# Altium PCB UltiSID.PcbDoc
Units mm, origin at the board's own origin, x right, y up, seen from the top; angles counter-clockwise.
Board outline 21 x 38.88 mm, 4 copper layers (Top Layer, Layer 1, Layer 2, Bottom Layer), stack 0.603 mm thick; 34 components, 45 nets, 209 pads, 58 vias.
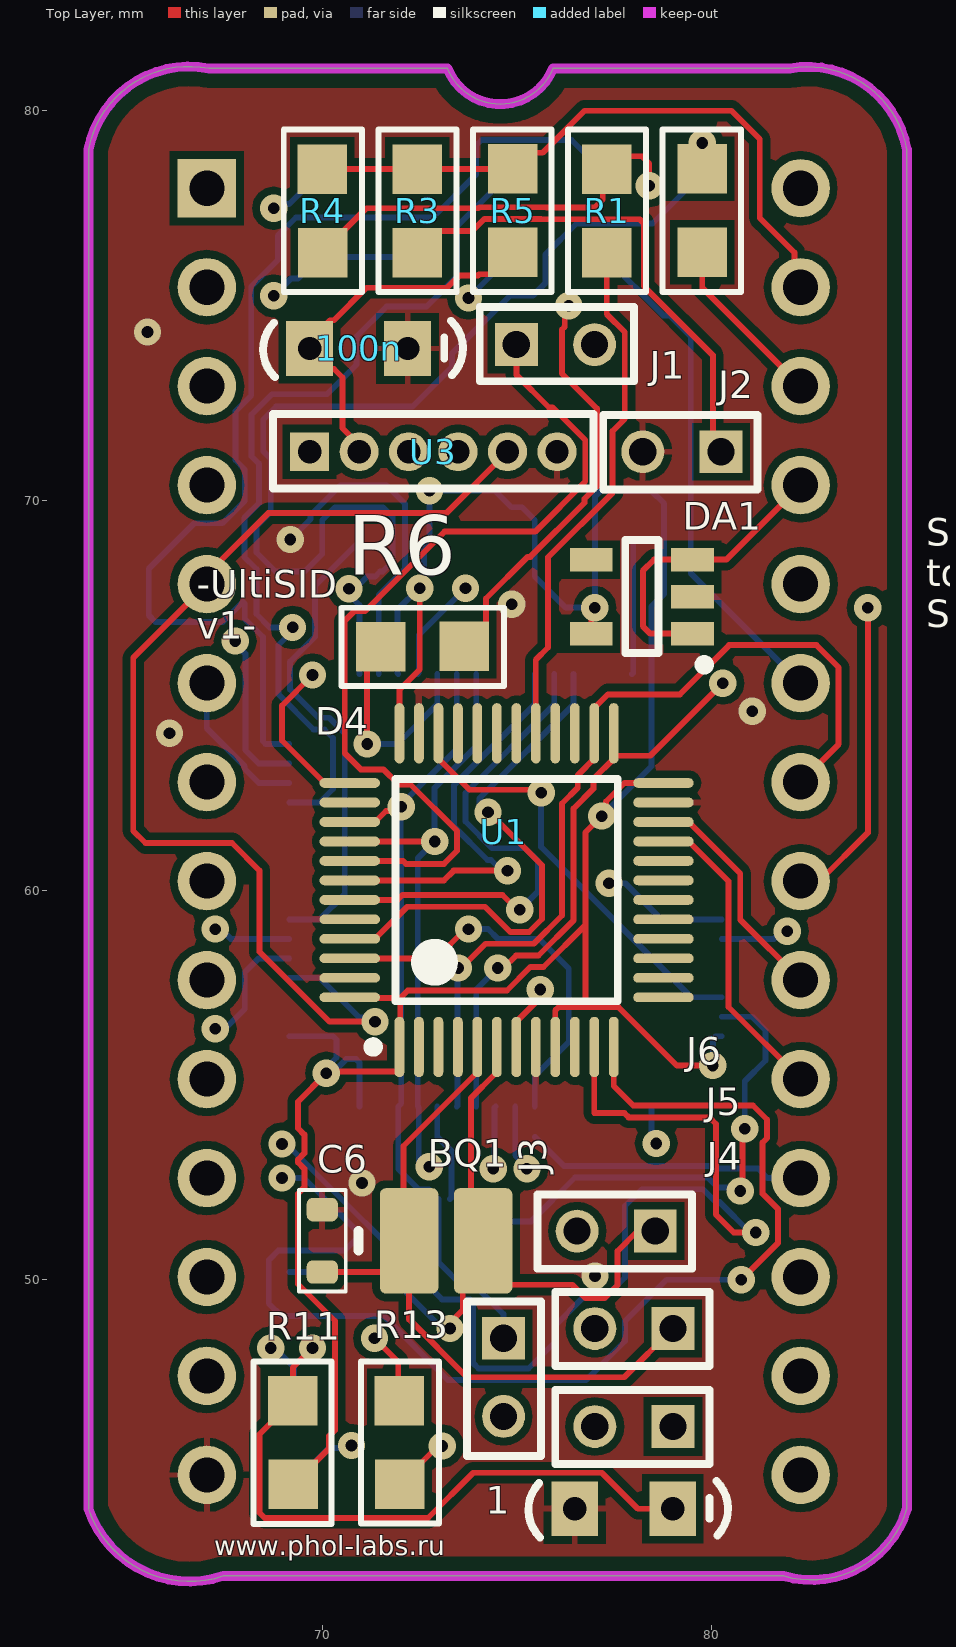
[diagram p0: Top Layer view]
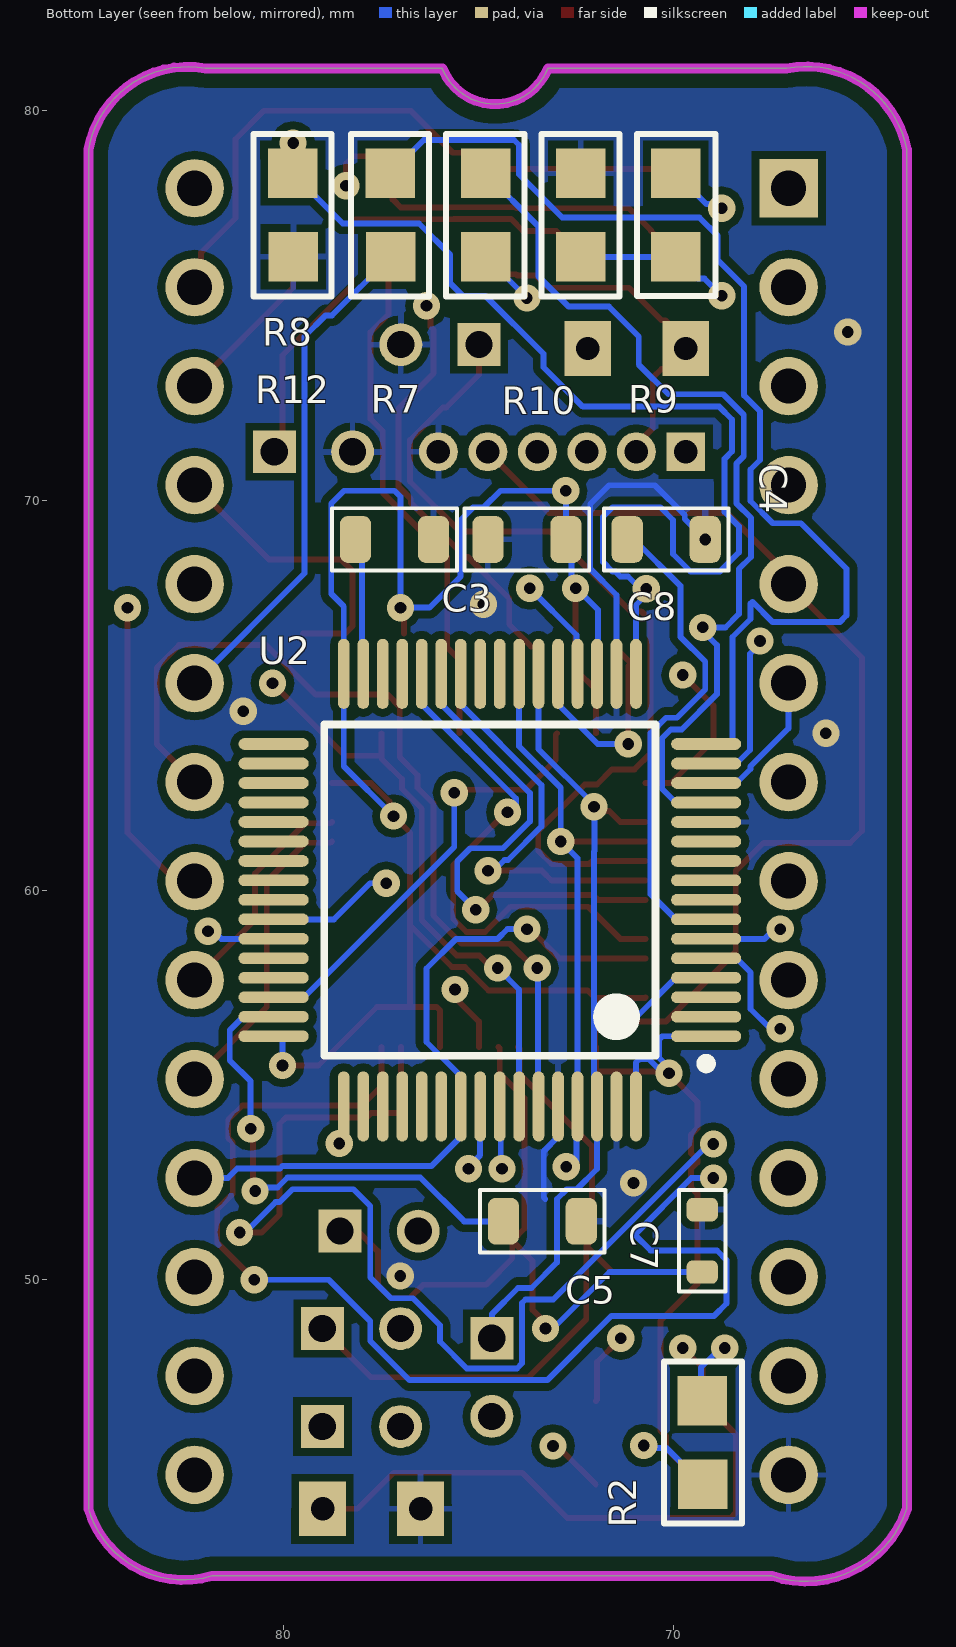
[diagram p1: Bottom Layer view, seen from below]
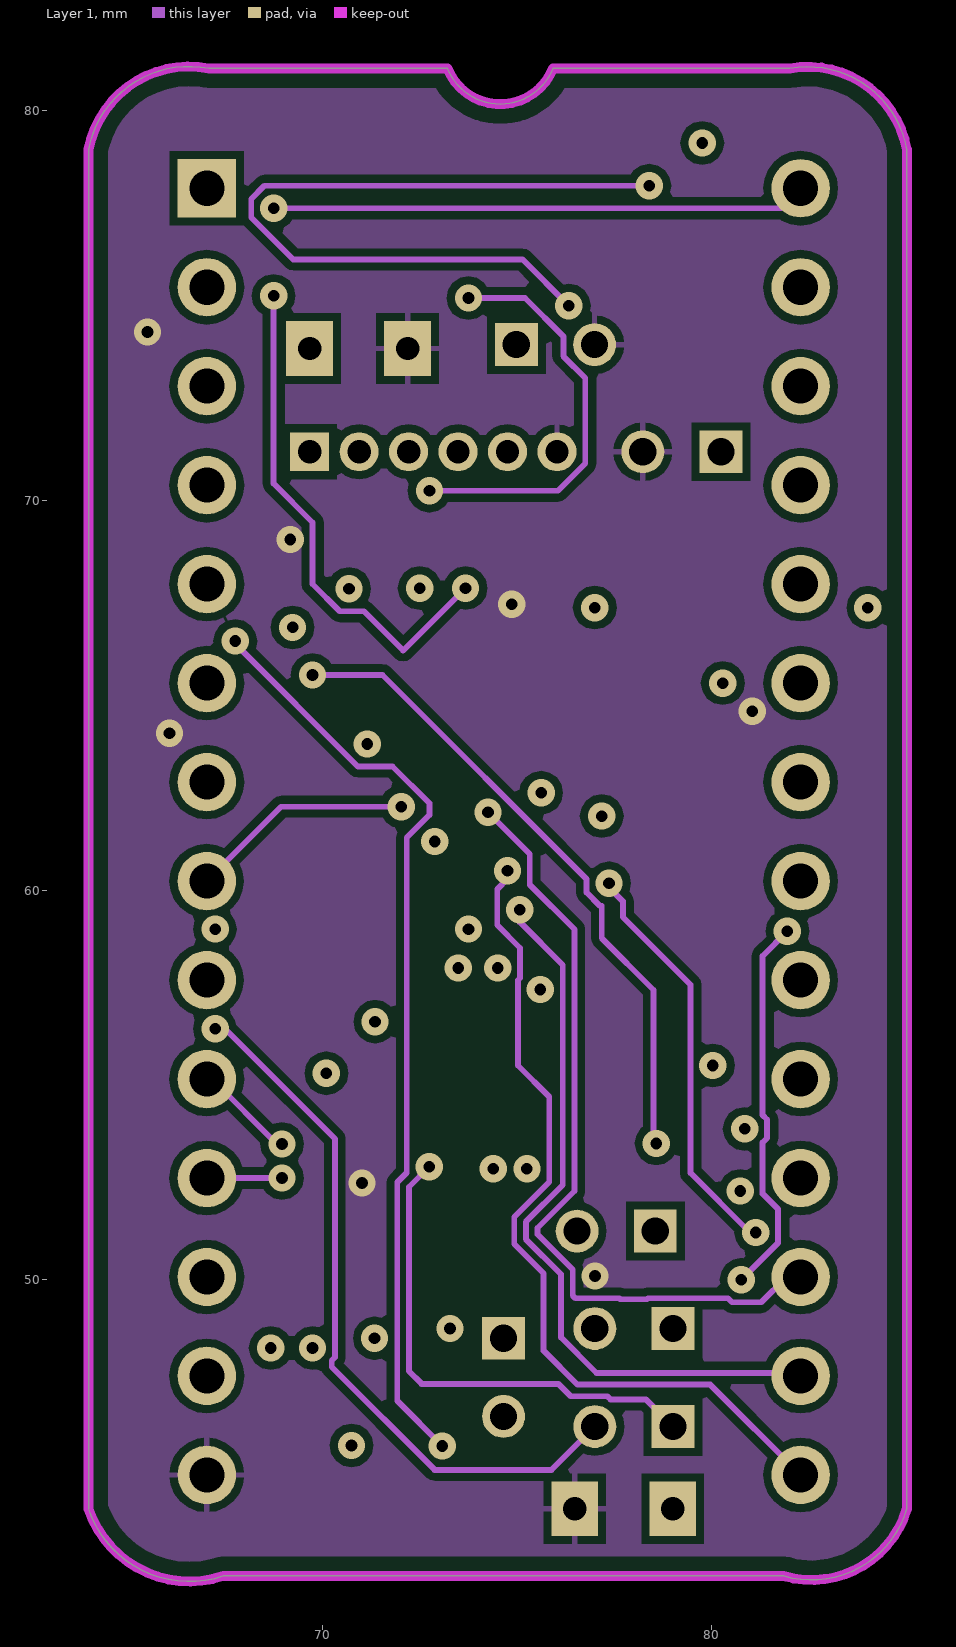
[diagram p2: Layer 1]
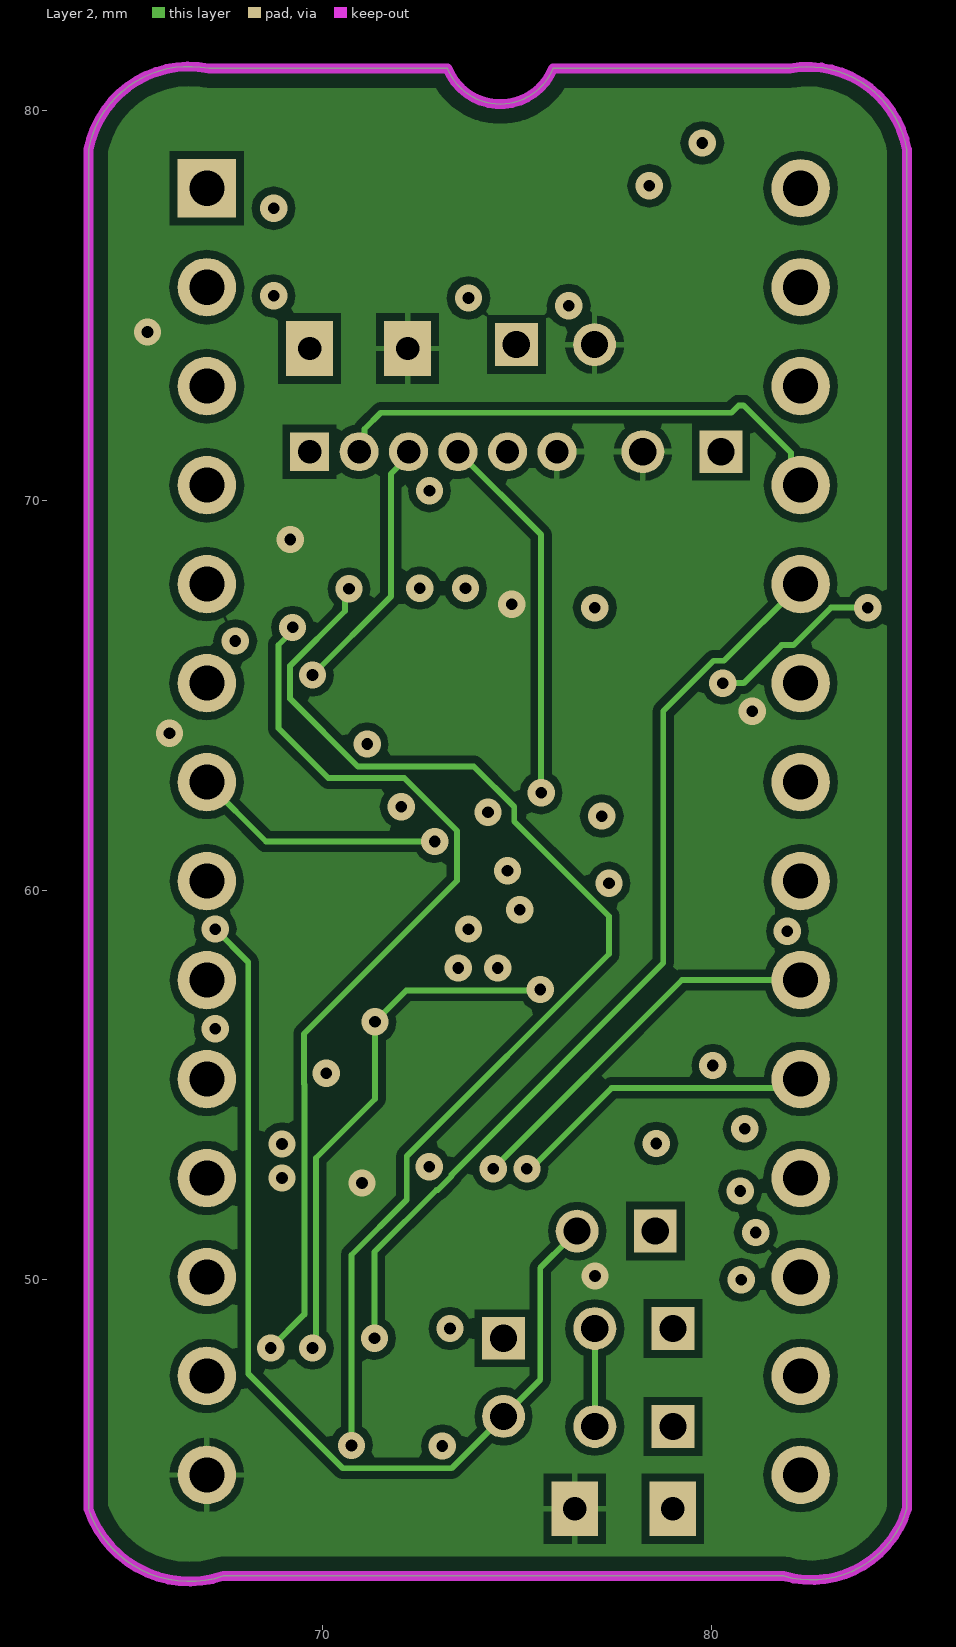
[diagram p3: Layer 2]

## Layer stack, top to bottom
Top Solder: solder mask 0.0102, Solder Resist, Dk 3.5
Top Layer: signal copper 0.0356
Dielectric 2: prepreg 0.0711, PP-006, Dk 4.1
Layer 1: signal copper 0.035
Dielectric 1: dielectric 0.32, FR-4, Dk 4.8
Layer 2: signal copper 0.035
Dielectric 3: prepreg 0.0711, PP-006, Dk 4.1
Bottom Layer: signal copper 0.0356
Bottom Solder: solder mask 0.0102, Solder Resist, Dk 3.5

## Board outline
64,44.123 ccw(c66.594,44.995) 67.464,42.4 81.836,42.4 ccw(c82.556,44.844) 85,44.123 85,79.011 ccw(c82.462,78.549) 82,81.087 75.919,81.087 cw(c74.566,81.626) 73.213,81.087 73,81.087 67.087,81.087 ccw(c66.582,78.506) 64,79.011

## Design rules (kind name [scope] priority, off if disabled: settings)
BackDrilling [All] p1: maxstublength=0.381 usetopbackdrill=TRUE usebottombackdrill=TRUE holeoversize=0.025 holetolplus=0 holetolminus=0
BoardOutlineClearance [All] p1: gap=0.5 ignorepadtopadclearanceinfootprint=FALSE except(0: Arc-SplitBarrior Arc-SplitContinuation Track-SplitBarrior Track-SplitContinuation SMDPad-SplitContinuation THPad-SplitContinuation Via-SplitBarrior Via-SplitContinuation Fill-SplitBarrior Fill-SplitContinuation Poly-SplitBarrior Poly-SplitContinuation Region-SplitBarrior Region-SplitContinuation Text-SplitBarrior Text-SplitContinuation)
Clearance [All] p1: gap=0.15 ignorepadtopadclearanceinfootprint=FALSE except(0.2: Arc-Fill Arc-Poly Arc-Region Track-Fill Track-Poly Track-Region SMDPad-Fill SMDPad-Poly SMDPad-Region THPad-Fill THPad-Poly THPad-Region Via-Fill Via-Poly Via-Region Fill-Fill Fill-Poly Fill-Region Poly-Poly Poly-Region Region-Region)
ComponentClearance [All] p1: gap=-0.05 collisioncheckmode=3 verticalgap=0 showdistances=TRUE
DiffPairsRouting [All] p1: maxlimit=0.15 minlimit=0.15 mostfreqgap=0.15 toplayer_minwidth=0.15 toplayer_maxwidth=0.15 toplayer_prefwidth=0.15 midlayer1_minwidth=0.15 midlayer1_maxwidth=0.15 midlayer1_prefwidth=0.15 midlayer2_minwidth=0.15 midlayer2_maxwidth=0.15 midlayer2_prefwidth=0.15 bottomlayer_minwidth=0.15 bottomlayer_maxwidth=0.15 bottomlayer_prefwidth=0.15 maxuncoupledlength=5
FabricationTestPointUsage TestPointUsage [All] p1: valid=0 allowmultiple=FALSE
FabricationTestpoint Testpoint [All] p1: side=3 testpointundercomponent=TRUE minsize=1.016 maxsize=2.54 preferedsize=1.524 minholesize=0.508 maxholesize=1.016 preferedholesize=0.813 testpointgrid=0.025 allowsidetop=TRUE allowsidebottom=TRUE usegrid=TRUE gridtolerance=0
Height [All] p1: minheight=0 maxheight=50 prefheight=10
HoleSize [All] p1: absolutevalues=TRUE maxlimit=5 minlimit=0.3 maxpercent=80.000 minpercent=20.000
HoleToHoleClearance [All] p1: gap=0.4 allowstackedmicrovias=TRUE
MinimumAnnularRing [All] p1: minimumring=0.2
MinimumSolderMaskSliver [All] p1: minsoldermaskwidth=0.15
PlaneClearance [All] p1: clearance=0.254
PolygonConnect [All] p1: thpad.connectstyle=Relief thpad.reliefconductorwidth=0.15 thpad.reliefentries=4 thpad.polygonreliefangle="90 Angle" thpad.airgapwidth=0.2 smdpad.connectstyle=Relief smdpad.reliefconductorwidth=0.15 smdpad.reliefentries=4 smdpad.polygonreliefangle="90 Angle" smdpad.airgapwidth=0.2 via.connectstyle=Direct via.reliefconductorwidth=0.15 via.reliefentries=4 via.polygonreliefangle="90 Angle" via.airgapwidth=0.2
RoutingVias [All] p1: holewidth=0.3 width=0.7 viastyle="Through Hole" minholewidth=0.3 minwidth=0.7 maxholewidth=2 maxwidth=3
SilkToSilkClearance [All] p1: silktosilkclearance=0.15
SilkToSolderMaskClearance SilkscreenOverComponentPads [IsPad] p1: minsilkscreentomaskgap=0.1 clearancetoexposedcopper=TRUE
SolderMaskExpansion [All] p1: expansion=0.075
ViasUnderSMD [All] p1: allowed=TRUE
Width [All] p1: maxlimit=5 minlimit=0.15 preferedwidth=0.15
19 further rules are at their usual default settings.

## Components (designator, comment, footprint, x,y, rotation, side; value= is the part's Value field where it differs from the comment)
1 "C" "THROUGH HOLE - CAP POL (mini)" 76.479,44.125 r0 top
100n "C" "THROUGH HOLE - CAP POL (mini)" 69.673,73.9 r0 top
BQ1 "XTAL" XTAL3225 73.177,51 r0 top value="8 MHz"
C3 "CAP" C-0805 77.147,69 r180 bottom value=10.0
C4 "CAP" C-0805 70.175,69 r0 bottom value=10.0
C5 "CAP" C-0805 73.354,51.5 r180 bottom value=10.0
C6 "CAP" C-0603 70,51 r90 top value=12
C7 "CAP" C-0603 69.25,51 r90 bottom value=12
C8 "CAP" C-0805 73.75,69 r0 bottom value=10.0
D4 "Microcontroller" TQFP48_L 74.729,60 r90 top value=STM32F103C6
DA1 "=Device" SOT95P280X145-5N 78.2,67.532 r180 top
J1 "Jumper" "2-PIN HEADER SMALL 2mm" 74.979,74 r0 top
J2 "Jumper" "2-PIN HEADER SMALL 2mm" 80.232,71.25 r180 top
J3 "Jumper" "2-PIN HEADER SMALL 2mm" 74.65,48.5 r270 top
J4 "Jumper" "2-PIN HEADER SMALL 2mm" 79,46.235 r180 top
J5 "Jumper" "2-PIN HEADER SMALL 2mm" 79,48.75 r180 top
J6 "Jumper" "2-PIN HEADER SMALL 2mm" 78.545,51.25 r180 top
R1 "1K" "SMD-0805 - R" 77.293,78.5 r270 top
R2 "4K7" "SMD-0805 - R" 69.244,46.892 r270 bottom
R3 "1K" "SMD-0805 - R" 72.431,78.5 r270 top
R4 "2K2" "SMD-0805 - R" 70,78.5 r270 top
R5 "4K7" "SMD-0805 - R" 74.888,76.366 r90 top
R6 "1K" "SMD-0805 - R" 73.642,66.256 r180 top
R7 "4K7" "SMD-0805 - R" 74.806,76.25 r90 bottom
R8 "4K7" "SMD-0805 - R" 79.75,76.25 r90 bottom
R9 "4K7" "SMD-0805 - R" 69.93,78.392 r270 bottom
R10 "4K7" "SMD-0805 - R" 72.362,76.25 r90 bottom
R11 "4K7" "SMD-0805 - R" 69.25,44.75 r90 top
R12 "1K" "SMD-0805 - R" 77.25,76.25 r90 bottom
R13 "1K" "SMD-0805 - R" 71.979,46.892 r270 top
U1 "nano Swin SID PCB" DIP-28-AY-38192-SID 67.005,77.927 r270 top locked
U2 "STM32F405RGT6" STM-LQFP64_N 74.7,60 r0 bottom
U3 "6PinConector" "6-PIN HEADER small 1.27mm" 69.673,71.25 r0 top
? "4K7" "SMD-0805 - R" 79.75,76.366 r90 top

## Footprints (in the part's own frame and the unit in brackets; to place one, negate y for a bottom-side part, rotate by r counter-clockwise, add the part's x,y. Pads: shape width x height; smd on the part's side, far side on the other; paste and mask are expansions set on the pad)
"2-PIN HEADER SMALL 2mm" [mm]
  rect 1.1x1.1 hole 0.7: 1(0,0)
  round 1.1 hole 0.7: 2(2.007,0)
  silkscreen extent -0.94,-0.94 3.02,0.97
"6-PIN HEADER small 1.27mm" [mm]
  rect 1x1 hole 0.6: 1(0,0)
  round 1 hole 0.6: 2(1.27,0) 3(2.54,0) 4(3.81,0) 5(5.08,0) 6(6.35,0)
  silkscreen extent -0.94,-0.94 7.29,0.97
C-0603 [mm] "Chip Capacitor, Body 1.6x0.8mm"
  rrect50% 0.6x0.8 smd: 1(-0.8,0) 2(0.8,0)
  silkscreen extent -1.3,-0.6 1.3,0.6, body extent -0.8,-0.4 0.8,0.4, height 0.82
C-0805 [mm] "Chip Capacitor, Body 2.0x1.25mm"
  rrect50% 0.8x1.2 smd: 1(-1,0) 2(1,0)
  silkscreen extent -1.6,-0.8 1.6,0.8, body extent -1,-0.62 1,0.63, height 0.62
DIP-28-AY-38192-SID [mm] "CerDIP, Window; 28 Leads; Row Spacing 15.24 mm; Pitch 2.54 mm"
  rect 1.5x1.5 hole 0.9: 1(-0.085,0.03)
  round 1.5 hole 0.9: 2(2.455,0.03) 3(4.995,0.03) 4(7.535,0.03) 5(10.075,0.03) 6(12.615,0.03) 7(15.155,0.03) 8(17.695,0.03) 9(20.235,0.03) 10(22.775,0.03) 11(25.315,0.03) 12(27.855,0.03) 13(30.395,0.03) 14(32.935,0.03) 15(32.935,15.27) 16(30.395,15.27) 17(27.855,15.27) 18(25.315,15.27) 19(22.775,15.27) 20(20.235,15.27) 21(17.695,15.27) 22(15.155,15.27) 23(12.615,15.27) 24(10.075,15.27) 25(7.535,15.27) 26(4.995,15.27) 27(2.455,15.27) 28(-0.085,15.27)
"SMD-0805 - R" [mm]
  rect 1.27x1.27 smd: 1(0,0) 2(2.142,0.006)
  silkscreen extent -1.02,-0.99 3.15,1.02
SOT95P280X145-5N [mm] "SOT, 0.95mm pitch; 5 pin, 1.60mm W X 2.90mm L X 1.45mm H body, IPC Medium Density"
  rect 1.1x0.6 smd: 1(-1.3,0.95) 2(-1.3,0) 3(-1.3,-0.95) 4(1.3,-0.95) 5(1.3,0.95)
  silkscreen extent -1.73,-1.45 0.43,1.87, body extent -1.4,-1.5 1.4,1.5, height 1.45
STM-LQFP64_N [mm] "Thin QFP, 64-Leads, Body 10x10mm, Pitch 0.5mm, IPC Medium Density"
  oval 1.8x0.3 smd: 1(-5.55,3.75) 2(-5.55,3.25) 3(-5.55,2.75) 4(-5.55,2.25) 5(-5.55,1.75) 6(-5.55,1.25) 7(-5.55,0.75) 8(-5.55,0.25) 9(-5.55,-0.25) 10(-5.55,-0.75) 11(-5.55,-1.25) 12(-5.55,-1.75) 13(-5.55,-2.25) 14(-5.55,-2.75) 15(-5.55,-3.25) 16(-5.55,-3.75) 33(5.55,-3.75) 34(5.55,-3.25) 35(5.55,-2.75) 36(5.55,-2.25) 37(5.55,-1.75) 38(5.55,-1.25) 39(5.55,-0.75) 40(5.55,-0.25) 41(5.55,0.25) 42(5.55,0.75) 43(5.55,1.25) 44(5.55,1.75) 45(5.55,2.25) 46(5.55,2.75) 47(5.55,3.25) 48(5.55,3.75)
  oval 0.3x1.8 smd: 17(-3.75,-5.55) 18(-3.25,-5.55) 19(-2.75,-5.55) 20(-2.25,-5.55) 21(-1.75,-5.55) 22(-1.25,-5.55) 23(-0.75,-5.55) 24(-0.25,-5.55) 25(0.25,-5.55) 26(0.75,-5.55) 27(1.25,-5.55) 28(1.75,-5.55) 29(2.25,-5.55) 30(2.75,-5.55) 31(3.25,-5.55) 32(3.75,-5.55) 49(3.75,5.55) 50(3.25,5.55) 51(2.75,5.55) 52(2.25,5.55) 53(1.75,5.55) 54(1.25,5.55) 55(0.75,5.55) 56(0.25,5.55) 57(-0.25,5.55) 58(-0.75,5.55) 59(-1.25,5.55) 60(-1.75,5.55) 61(-2.25,5.55) 62(-2.75,5.55) 63(-3.25,5.55) 64(-3.75,5.55)
  silkscreen extent -5.67,-4.25 4.25,4.57, body extent -5,-5 5,5, height 1.6
"THROUGH HOLE - CAP POL (mini)" [mm]
  rect 1.2x1.4 hole 0.6: 1(0,0) 2(2.515,0)
  silkscreen extent -1.19,-0.74 3.93,0.71
TQFP48_L [mm] "48-Pin Thin Quad Flat Pack 0.5 mm Pitch, IPC High Density"
  oval 1.55x0.25 smd: 1(-4.025,2.75) 2(-4.025,2.25) 3(-4.025,1.75) 4(-4.025,1.25) 5(-4.025,0.75) 6(-4.025,0.25) 7(-4.025,-0.25) 8(-4.025,-0.75) 9(-4.025,-1.25) 10(-4.025,-1.75) 11(-4.025,-2.25) 12(-4.025,-2.75) 25(4.025,-2.75) 26(4.025,-2.25) 27(4.025,-1.75) 28(4.025,-1.25) 29(4.025,-0.75) 30(4.025,-0.25) 31(4.025,0.25) 32(4.025,0.75) 33(4.025,1.25) 34(4.025,1.75) 35(4.025,2.25) 36(4.025,2.75)
  oval 0.25x1.55 smd: 13(-2.75,-4.025) 14(-2.25,-4.025) 15(-1.75,-4.025) 16(-1.25,-4.025) 17(-0.75,-4.025) 18(-0.25,-4.025) 19(0.25,-4.025) 20(0.75,-4.025) 21(1.25,-4.025) 22(1.75,-4.025) 23(2.25,-4.025) 24(2.75,-4.025) 37(2.75,4.025) 38(2.25,4.025) 39(1.75,4.025) 40(1.25,4.025) 41(0.75,4.025) 42(0.25,4.025) 43(-0.25,4.025) 44(-0.75,4.025) 45(-1.25,4.025) 46(-1.75,4.025) 47(-2.25,4.025) 48(-2.75,4.025)
  silkscreen extent -4.15,-2.85 2.85,3.55, body extent -3.5,-3.5 3.5,3.5, height 1.6
XTAL3225 [mm] "XTAL, Body 3.2x2.5mm"
  rrect20% 1.5x2.7 smd: 1(-0.95,0) 2(0.95,0)
  silkscreen extent -2.25,-0.25 -2.25,0.25, body extent -1.6,-1.25 1.6,1.25, height 1

## Part data
BQ1: "Crystal Oscillator", Manufacturer=NDK, Package=3225, Part Number=NX3225GD-8MHZ-STD-CRA-3, Tolerance="50 ppm", Parameters="8 MHz 8pF 50 ppm"
C3 C4 C5 C8: "Capacitor", Alt Part Num=CC0805KKX7R6BB106, Manufacturer=Yageo, Package=0805, Part Number="0805-10uF 10V +/-10% X7R", Tolerance=10%, Parameters="X7R, 10V", Unit Price=0.0359
C6 C7: "Capacitor", Alt Part Num=CL10C120JB8NNNC, Manufacturer=Samsung, Package=0603, Part Number="0603-12pF 50V +/-5% NP0", Tolerance=5%, Parameters="NP0, 50V", Unit Price=0.0018
D4: library part STM32F103Cx, "MC Cortex-M3", Manufacturer=ST, Package=LQFP-48, Part Number=STM32F103C6T6A, Parameters=16-32K
DA1: library part LP2985, "150mA Low-Noise Low-Dropout Regulator Whit Shutdown"
R1 R2 R3 R4 R5 R6 R7 R8 R9 R10 R11 R12 R13 ?: library part R
U1: library part MOS6581_SID
U2: "ARM Cortex-M4 32-bit MCU+FPU, 210 DMIPS, 1024 kB Flash, 192 kB Internal RAM, 51 I/Os, 64-pin LQFP, -40 to 85 degC, Tray", I/Os (High Current)=51, Manufacturer=STMicroelectronics, Operating Frequency(F) (Processor speed) (MHz)=168, Supplier Part Number 1=497-11767-ND, Supply Voltage(Vcc) max (V)=3.6, Supply Voltage(Vcc) min (V)=1.8, ComponentLink1Description="Manufacturer URL", ComponentLink1URL=http://www.st.com/web/en/home.html, ComponentLink2Description=Datasheet, ComponentLink2URL=http://www.st.com/st-web-ui/static/active/en/resource/technical/document/datasheet/DM00037051.pdf, ComponentLink3Description="Package Specification", ComponentLink3URL=http://www.st.com/st-web-ui/static/active/en/resource/technical/document/datasheet/DM00037051.pdf, Core="ARM Cortex-M4", D/A Converter=2x12-bit, DatasheetVersion="Rev. 4", FLASH Size (Prog) (kB)=1024, Internal RAM Size (kB)=192, Mounting Technology="Surface Mount", PackageDescription="64-Pin Low Profile Quad Flat Package, 10 x 10 mm Body, 0.5 mm Pitch", PackageReference=LQFP64, PackageVersion="Rev. 4, 06/2013", Packing=Tray, PartNumber=STM32F405RGT6, Supplier 1=Digi-Key, Supplier 2=Farnell, Supplier 3=Newark, Supplier 4=Mouser, Supplier Part Number 2=2064363, Supplier Part Number 3=73T2329, Supplier Part Number 4=511-STM32F405RGT6

## Via types
v1: diameter 0.7, hole 0.3, Top Layer to Bottom Layer, tented both sides, 43 vias
v2: diameter 0.7, hole 0.3, Top Layer to Bottom Layer, 15 vias

## Nets (pads, with @x,y where several pads share a name; then routed paths per layer and width w, separated by ;. In a path a pad name is that pad's centre, name@x,y a point inside that pad or via, vN(x,y) a via of type N, cw(c..) or ccw(c..) an arc to the next point about the centre after c; other vN are vias at no path point)
3V3: C8.1 D4.1 D4.9 D4.24 D4.36 D4.48 DA1.5 R7.1 R11.1 U2.1 U2.19 U2.32 U2.48 U2.64 | length 82.4
  Top Layer w0.15: R11.1 70.175,45.675 70.175,45.988 70.325,46.138 70.325,48.945 69.375,49.895 69.375,52.21 69.539,52.374 69.539,52.85 69.375,53.014 69.375,53.085 69.539,53.249 69.539,53.725 69.375,53.889 69.375,54.571 v1(70.104,55.3) 70.154,55.35 71.933,55.35 71.979,55.396 D4.1 71.998,55.994 71.998,57.229 72,57.231 ; D4.48 70.723,57.231 72,57.231 ; D4.36 71.979,65.141 72.5,65.662 v2(72.5,67.75) ; D4.9 75.979,56.914 76.067,57.002 76.729,57.002 ; DA1.5 76.9,67.157 v2(76.993,67.25) ; D4.24 77.754,62.75 77.277,62.273 77.277,62.005 v1(77.172,61.9) 76.75,61.478 76.75,59.101 ; v1(80.022,55.5) 79.099,55.5 77.597,57.002 76.729,57.002 ; 72,57.231 72.194,57.425 74.738,57.425 75.338,58.025 75.674,58.025 76.75,59.101 ; 76.729,57.002 76.75,57.023 76.75,59.101
  Layer 1 w0.15: v1(72.75,70.25) 76.048,70.25 76.748,70.95 76.748,73.141 76.185,73.704 76.185,74.212 75.203,75.194 v1(73.75,75.194)
  Bottom Layer w0.15: U2.1 70.275,56.25 70.363,56.162 70.363,55.708 70.104,55.449 v1(70.104,55.3) 70.253,55.3 70.616,55.663 70.862,55.663 70.95,55.575 U2.64 ; U2.19 71.925,65.575 71.925,67.196 v2@72.479,67.75 ; v2(72.5,67.75) v2@72.479,67.75 ; v1(73.75,75.194) R7.1 ; v1(77.172,61.9) 78.45,63.178 U2.32 78.45,67.282 78.772,67.605 78.772,69.921 78.444,70.25 77.147,70.25 76.993,70.096 v2(76.993,67.25) 76.25,67.25 75.45,68.05 75.45,69.501 75.126,69.825 74.855,69.825 74.43,70.25 v1(72.75,70.25) C8.1 72.605,68.855 72.605,67.876 v2@72.479,67.75 ; v1(80.022,55.5) 80.022,56.181 80.092,56.25 U2.48
6581SEL: D4.41 J1.1 | length 22.5
  Top Layer w0.15: D4.41 72.073,60.75 72.148,60.675 73.12,60.675 73.457,61.012 73.457,61.521 72.265,62.713 71.953,62.713 71.566,63.1 70.987,63.1 70.575,63.512 70.575,66.913 70.818,67.156 71.093,67.156 73.137,69.2 75.462,69.2 76.748,70.486 76.748,71.55 75.911,72.388 75.816,72.388 74.979,73.225 J1.1
!CS: D4.39 J3.1 U1.8 U2.22 U2.62 | length 26.4
  Top Layer w0.15: D4.39 71.354,61.75 71.637,62.033 71.922,62.033 v1(72.027,62.138)
  Layer 1 w0.15: U1.8 68.941,62.138 v1(72.027,62.138)
  Bottom Layer w0.15: U2.22 73.45,63.618 72.027,62.195 v1(72.027,62.138) 72.011,62.122 72.011,61.012 72.027,60.995 72.027,54.527 U2.62 71.95,52.844 72.469,52.325 72.73,52.325 72.979,52.076 72.979,50.447 73.634,49.792 73.978,49.792 74.65,49.12 J3.1
!RES: 1.2 D4.7 R11.2 U1.5 U2.4 U3.5 | length 60.2
  Top Layer w0.15: v1(69.75,48.25) 69.742,48.25 69.244,47.752 R11.2 68.39,46.038 68.39,44.022 68.522,43.89 72.713,43.89 73.872,45.05 77.172,45.05 78.097,44.125 1.2 ; v1(71.354,56.625) 70.184,56.625 68.389,58.42 68.389,60.5 67.682,61.207 65.46,61.207 65.148,61.519 65.148,65.965 U1.5 67.119,67.852 67.119,68.182 68.612,69.675 73.178,69.675 U3.5 ; D4.7 74.979,56.625 75.49,57.136 75.49,57.345 v1(75.595,57.45)
  Layer 2 w0.15: v1(69.75,48.25) 69.839,48.339 69.839,53.124 71.354,54.639 v1(71.354,56.625) 72.154,57.425 75.57,57.425 v1(75.595,57.45)
  Bottom Layer w0.15: U2.4 69.93,57.75 70.95,56.73 71.249,56.73 v1(71.354,56.625)
/2: U1.6 U2.14 | length 3.9
  Bottom Layer w0.15: U1.6 67.035,64.151 68.01,63.176 68.01,63.109 68.37,62.75 U2.14
A0: U1.9
A1: D4.11 U1.10 U2.42 | length 44.1
  Top Layer w0.15: D4.11 76.979,54.276 77.753,54.276 77.86,54.169 79.929,54.169 80.1,53.998 80.1,51.673 80.557,51.215 v1(81.123,51.215)
  Layer 1 w0.15: U1.10 67.167,55.152 68.832,53.487 v1(68.964,53.487) ; v2(77.358,60.175) 77.358,60.07 77.712,59.716 77.712,59.308 79.447,57.573 79.447,52.744 80.976,51.215 v1(81.123,51.215)
  Bottom Layer w0.15: v1(68.964,53.487) 69.081,53.487 73.076,49.492 73.787,49.492 73.875,49.404 73.875,48.963 73.875,47.857 74.007,47.725 75.293,47.725 75.983,48.415 75.983,48.835 76.672,49.525 77.238,49.525 77.77,50.056 77.77,51.893 78.202,52.325 79.767,52.325 80.1,51.992 80.199,51.992 80.976,51.215 v1(81.123,51.215) ; v2(77.358,60.175) 77.775,60.175 78.7,59.25 U2.42
A2: D4.12 U1.11 U2.43 | length 44.2
  Top Layer w0.15: D4.12 77.479,54.975 77.979,54.475 81.051,54.475 81.414,54.111 81.414,53.635 81.3,53.521 81.3,52.518 81.3,52.208 81.698,51.811 81.698,50.948 v1(80.75,50)
  Layer 1 w0.15: U1.11 v1(68.964,52.612) ; v1(80.75,50) 81.698,50.948 81.698,51.811 81.3,52.208 81.3,53.521 81.414,53.635 81.414,54.111 81.3,54.225 81.3,58.308 v1(81.934,58.942)
  Bottom Layer w0.15: v1(68.964,52.612) 69.531,52.612 70.984,51.159 70.575,50.75 68.87,50.75 68.625,50.505 68.625,49.395 68.945,49.075 71.576,49.075 73.226,47.425 76.764,47.425 77.768,48.429 77.768,48.937 78.832,50 v1(80.75,50) ; U2.43 81.593,58.75 81.785,58.942 v1(81.934,58.942)
A3: U1.12
A4: U1.13
A5: D4.14
AUD1: D4.29 R1.2 | length 13.5
  Top Layer w0.15: D4.29 75.479,65.91 75.794,66.225 75.794,68.544 77.45,70.2 77.45,71.78 77.695,72.025 77.76,72.091 77.76,74.321 77.299,74.782 R1.2
AUOUT: R6.2 U2.21 | length 5.7
  Top Layer w0.15: v2(71.15,63.75) 71.15,65.752 71.076,65.826 R6.2
  Bottom Layer w0.15: v2(71.15,63.75) 71.93,63.75 72.95,64.77 U2.21
AX: R13.2 U2.15 | length 29.4
  Top Layer w0.15: R13.2 v1@72.828,45.593
  Layer 1 w0.15: v1(67.766,66.391) 67.766,66.32 70.912,63.175 71.803,63.175 72.75,62.228 72.75,61.931 72.169,61.35 72.169,52.749 71.923,52.504 71.923,46.895 v1(73.081,45.737)
  Bottom Layer w0.15: v1(67.766,66.391) 67.766,66.325 68.025,66.066 68.025,63.595 68.37,63.25 U2.15
AY: R12.2 U2.16 | length 29.1
  Bottom Layer w0.15: 67.963,67.401 67.439,66.877 65.721,66.877 65.547,67.052 65.547,68.249 66.715,69.417 67.439,69.417 68.01,69.988 68.01,70.796 67.77,71.037 67.77,72.288 68.175,72.693 68.175,75.488 68.855,76.168 68.855,76.792 69.325,77.262 72.843,77.262 73.952,78.371 73.952,79.12 74.084,79.252 76.396,79.252 R12.2 ; 68.01,67.355 68.01,66.961 68.475,66.496 68.475,63.819 68.544,63.75 U2.16
D0: D4.42 U1.15 U2.26 | length 32.4
  Top Layer w0.15: D4.42 73.119,60.25 73.369,60.5 v1(74.75,60.5)
  Layer 1 w0.15: v1(74.75,60.5) 74.75,60.287 74.488,60.025 74.488,59.103 75.075,58.516 75.075,57.743 75.02,57.688 75.02,55.502 75.825,54.698 75.825,52.512 74.924,51.611 74.924,50.92 75.679,50.165 75.679,48.181 76.55,47.31 79.957,47.31 U1.15
  Bottom Layer w0.15: v1(74.75,60.5) 74.601,60.5 74.326,60.775 74.237,60.775 73.375,61.637 73.375,62.695 75.45,64.77 U2.26
D1: D4.43 U1.16 U2.27 | length 31.8
  Top Layer w0.15: D4.43 71.93,59.75 72.054,59.875 74.625,59.875 75,59.5 v1(75.063,59.5)
  Layer 1 w0.15: v1(75.063,59.5) 75.063,59.187 76.17,58.08 76.17,52.433 75.224,51.487 75.224,51.044 76.125,50.143 76.125,48.522 77.037,47.61 82.197,47.61 U1.16
  Bottom Layer w0.15: v1(75.063,59.5) 75.538,59.975 75.538,60.738 75.201,61.075 74.362,61.075 73.675,61.762 73.675,62.495 75.95,64.77 U2.27
D2: D4.45 U1.17 U2.28 | length 34
  Top Layer w0.15: D4.45 71.354,58.75 72.179,59.575 74.175,59.575 74.825,58.925 75.301,58.925 75.638,59.262 75.638,60.638 74.276,62 v1(74.25,62)
  Layer 1 w0.15: v1(74.25,62) 75.325,60.925 75.325,60.138 76.47,58.993 76.47,52.278 75.524,51.332 75.524,51.168 76.425,50.267 76.425,49.593 76.493,49.525 77.622,49.525 77.647,49.5 78.332,49.5 78.357,49.525 80.412,49.525 80.512,49.425 81.263,49.425 81.91,50.072 U1.17
  Bottom Layer w0.15: v1@74.03,62.063 74.03,62.35 76.45,64.77 U2.28 ; v1@74.25,61.843 v1(74.25,62)
D3: D4.46 U1.18 U2.55 | length 17.5
  Top Layer w0.15: D4.46 72.923,58.25 73.673,59 v1(73.75,59)
  Bottom Layer w0.15: v1(73.75,59) 74.25,59 74.5,58.75 75.563,58.75 76.325,57.988 76.325,56.105 75.45,55.23 U2.55 ; U2.55@75.45,53.67 76.195,52.925 80.016,52.925 80.086,52.855 81.182,52.855 81.425,52.612 U1.18
D4: D4.21 U1.19 U2.56 | length 17.8
  Top Layer w0.15: D4.21 78.787,61.217 79.437,61.217 80.425,60.228 80.425,57.002 U1.19
  Layer 2 w0.15: v1@75.25,52.75 77.425,54.925 82.048,54.925 U1.19
  Bottom Layer w0.15: U2.56 74.95,53.199 75.25,52.899 v1@75.25,52.75
  other v1: 75.25,52.85
D5: D4.22 U1.20 U2.57 | length 17.4
  Top Layer w0.15: D4.22 78.787,61.717 79.437,61.717 80.727,60.427 80.727,59.241 U1.20
  Layer 2 w0.15: v1(74.387,52.85) 79.229,57.692 U1.20
  Bottom Layer w0.15: v1(74.387,52.85) 74.421,52.884 74.421,54.421 U2.57
D6: D4.25 U1.21 U2.58 | length 27.9
  Top Layer w0.15: v1(74.5,58) 74.649,58 74.974,58.325 75.55,58.325 76.45,59.225 76.45,62.098 76.955,62.602 76.955,62.851 77.479,63.375 D4.25@77.479,63.496 ; D4.25 D4.25@77.479,63.496 ; v2(80.278,65.312) 78.416,63.45 77.525,63.45 D4.25@77.479,63.496 ; U1.21@81.926,60.232 U1.21 82.76,60.232 84,61.472 v2(84,67.25)
  Layer 2 w0.15: v2(80.278,65.312) 80.812,65.312 81.787,66.287 82.089,66.287 83.052,67.25 v2(84,67.25)
  Bottom Layer w0.15: U2.58 73.95,57.45 v1(74.5,58)
D7: D4.26 U1.22 U2.59 | length 23
  Top Layer w0.15: v1(73.487,58) 73.563,58 74.188,58.625 75.426,58.625 76.15,59.349 76.15,62.222 76.555,62.627 76.555,62.951 77.012,63.408 77.012,64.708 77.329,65.025 79.178,65.025 80.44,66.287 82.679,66.287 83.25,65.716 83.25,63.747 U1.22
  Bottom Layer w0.15: U2.59 73.468,54.468 73.468,57.982 v1(73.487,58)
EXTIN: ?.1 U1.26 | length 4.5
  Top Layer w0.15: ?.1 79.75,75.457 U1.26
GND: 1.1 100n.2 C3.2 C4.1 C5.2 C6.2 C7.2 C8.2 D4.8 D4.23 D4.35 D4.44 D4.47 DA1.2 J1.2 J2.2 R8.1 R10.2 U1.14 U2.12 U2.18 U2.60 U2.63 U3.6 | length 11
  Bottom Layer w0.15: v2(69.175,69) 69.7,69.525 69.7,69.625 70.467,70.392 71.644,70.392 72.125,69.911 72.125,68.249 71.45,67.574 U2.18 ; U2.60 72.95,53.67 73.319,53.301 73.319,52.116 73.279,52.076
  other v2: 77,50.1 71.016,52.482 66.077,64.025 81.03,64.59 74.864,67.335 65.514,74.321
Net_2: ?.2 R2.2 R8.2 U2.17 | length 60.4
  Layer 2 w0.15: v1(70.687,67.731) 70.581,67.626 70.581,67.165 69.175,65.758 69.175,64.912 70.912,63.175 73.888,63.175 74.925,62.138 74.925,61.762 77.358,59.329 77.358,58.364 72.169,53.174 72.169,52.053 70.75,50.634 v1(70.75,45.75)
  Bottom Layer w0.15: R2.2 70.175,45.687 70.687,45.687 v1(70.75,45.75) ; U2.17 70.95,67.319 70.687,67.582 v1(70.687,67.731) 70.835,67.731 71.153,68.049 71.356,68.049 71.482,68.175 71.551,68.175 71.8,68.424 71.8,69.576 71.551,69.825 70.324,69.825 70,69.501 70,68.624 69.551,68.175 68.799,68.175 68.31,68.664 68.31,69.336 68.675,69.701 68.675,71.069 68.484,71.26 68.484,72.078 68.814,72.408 72.314,72.408 73.325,73.419 73.325,73.764 74.816,75.255 75.399,75.255 75.721,75.576 75.721,76.309 76.522,77.11 78.474,77.11 R8.2
  other v1: 79.75,79.175
NetC3_1: C3.1 U2.31 | length 3.5
  Bottom Layer w0.15: U2.31 77.978,65.578 C3.1@77.978,69
NetC4_2: C4.2 U2.7 | length 12.3
  Bottom Layer w0.15: U2.7 69.93,59.25 70.575,59.895 70.575,63.512 70.575,64.03 70.18,64.425 69.9,64.425 69.175,65.15 69.175,65.867 69.812,66.504 69.812,67.812 C4.2@71,69
NetC5_1: C5.1 U2.47 | length 12.6
  Top Layer w0.15: v1(80.725,52.28) 80.782,52.337 80.782,53.816 v1(80.839,53.873)
  Bottom Layer w0.15: C5.1 75.361,51.5 76.486,52.625 79.892,52.625 80.15,52.367 80.638,52.367 v1(80.725,52.28) ; U2.47 81.03,56.75 81.375,56.405 81.375,55.631 80.839,55.095 v1(80.839,53.873)
NetJ2_1: J2.1 R3.2 | length 12.8
  Top Layer w0.15: R3.2 72.997,76.918 73.851,76.918 74.159,77.226 75.616,77.226 75.624,77.218 78.144,77.218 78.25,77.112 78.25,75.5 80.022,73.728 J2.1@80.022,71.25
NetJ3_2: J3.2 J6.2 U2.6 | length 27.9
  Layer 2 w0.15: v1(67.25,59) 68.1,58.15 68.1,47.587 70.524,45.162 73.319,45.162 75.594,47.437 75.594,50.306 76.31,51.022 76.766,51.022 J6.2@76.993,51.25
  Bottom Layer w0.15: v1(67.25,59) 67.399,59 67.649,58.75 U2.6
NetJ4_2: J4.2 J5.2 U2.5 | length 24.2
  Layer 1 w0.15: v1(67.25,56.442) 67.5,56.442 70.325,53.617 70.325,48.012 70.244,47.93 70.244,47.761 72.882,45.123 75.881,45.123 J4.2
  Layer 2 w0.15: J4.2 J5.2
  Bottom Layer w0.15: v1(67.25,56.442) 67.5,56.442 68.01,56.952 68.01,57.891 68.37,58.25 U2.5
NetR1_1: R1.1 R4.2 R6.1 | length 41
  Top Layer w0.15: R4.2 70.566,76.918 70.566,76.935 71.131,77.5 74.009,77.5 74.035,77.526 75.74,77.526 75.749,77.518 76.985,77.518 77.195,77.728 77.195,78.402 R1.1 77.628,78.834 78.207,78.834 78.391,78.65 v2(78.391,78.075) ; R6.1 74.202,66.816 74.202,67.486 75.268,68.552 75.338,68.552 76.729,69.943 76.729,70.043 77.048,70.362 77.048,72.357 76.15,73.255 76.15,74.39 76.22,74.46 76.22,74.895 v2(76.325,75)
  Layer 1 w0.15: v2(76.325,75) 75.141,76.184 69.253,76.184 68.175,77.262 68.175,77.738 68.512,78.075 v2(78.391,78.075)
NetR3_1: R3.1 R4.1 R5.2 U1.27 | length 16.4
  Top Layer w0.15: R4.1 70.008,78.508 72.431,78.508 R5.2 75.298,78.925 75.654,78.925 76.729,80 80.5,80 81.224,79.276 81.224,77.25 82.115,76.359 82.115,75.632 U1.27
NetR9_1: R9.1 U1.28 | length 15.3
  Layer 1 w0.15: v1(68.75,77.5) 81.763,77.5 U1.28
  Bottom Layer w0.15: v1(68.75,77.5) 68.855,77.605 69.144,77.605 R9.1
OSC_I: BQ1.1 C6.1 D4.5 J5.1 | length 18.2
  Top Layer w0.15: C6.1 71.558,50.2 BQ1.1@72.227,50.869 ; D4.5 73.944,55.94 73.944,55.295 72.082,53.434 72.082,51.014 BQ1.1@72.227,50.869 ; J5.1 77.75,47.5 73.712,47.5 72.227,48.984 BQ1.1@72.227,50.869
OSC_O: BQ1.2 C7.1 D4.6 J6.1 | length 19.7
  Top Layer w0.15: v1(73.275,48.75) 73.275,48.899 73.602,49.226 73.602,50.475 BQ1.2 ; D4.6 74.446,55.942 74.446,55.292 73.812,54.658 73.812,51.315 BQ1.2 ; J6.1@79,51.25 78.089,51.25 77.575,50.736 77.575,49.862 77.238,49.525 76.762,49.525 76.412,49.875 74.797,49.875 74.127,50.544 BQ1.2
  Bottom Layer w0.15: C7.1@69.15,50.2 71.631,50.2 73.081,48.75 v1(73.275,48.75)
POTX: R13.1 U1.24 | length 25.9
  Top Layer w0.15: v1(71.338,48.5) 71.95,47.888 71.95,46.921 R13.1
  Layer 2 w0.15: v1(71.338,48.5) 71.338,50.718 72.928,52.307 72.964,52.307 73.319,52.662 73.319,52.698 78.75,58.129 78.75,64.597 80.04,65.887 80.31,65.887 U1.24
POTY: R12.1 U1.23 | length 13.1
  Bottom Layer w0.15: R12.1 78.75,74.75 78.912,74.75 79.457,74.206 79.457,68.131 U1.23
RW: D4.40 J4.1 U1.7 U2.23 U2.61 | length 35
  Top Layer w0.15: D4.40 v1(72.882,61.25)
  Layer 1 w0.15: v1(72.744,52.9) 72.223,52.379 72.223,47.656 72.549,47.33 76.057,47.33 76.377,47.01 77.314,47.01 77.393,46.932 78.303,46.932 J4.1
  Layer 2 w0.15: U1.7 68.557,61.25 v1(72.882,61.25)
  Bottom Layer w0.15: v1(72.744,52.9) 72.644,52.9 72.626,52.882 72.475,53.033 72.475,54.425 U2.61 72.45,60.818 v1(72.882,61.25) 72.882,62.626 73.95,63.694 U2.23
SWCLK: D4.37 U2.49 U3.3 | length 28.7
  Top Layer w0.15: v1(69.75,65.52) 68.964,64.734 68.964,63.84 70.054,62.75 D4.37
  Layer 1 w0.15: v1(69.75,65.52) 71.543,65.52 76.783,60.28 76.783,59.937 77.12,59.6 77.169,59.6 77.169,58.767 78.5,57.437 78.5,53.568 v1(78.568,53.5)
  Layer 2 w0.15: v1(69.75,65.52) 69.75,65.523 71.759,67.532 71.759,70.679 72.213,71.133 U3.3
  Bottom Layer w0.15: U2.49 78.45,53.618 v1(78.568,53.5)
SWDIO: D4.34 U2.46 U3.4 | length 20.9
  Top Layer w0.15: D4.34 73.012,63.992 73.012,63.342 73.779,62.575 75.54,62.575 v1(75.615,62.5)
  Layer 2 w0.15: U3.4 75.615,69.118 v1(75.615,62.5)
  Bottom Layer w0.15: v1(75.615,62.5) 75.615,61.105 79.47,57.25 U2.46
VCC: 100n.1 DA1.1 DA1.3 R5.1 U1.25 U3.2 | length 30.6
  Top Layer w0.15: U3.2 70.943,71.432 70.52,71.856 70.52,73.153 70.298,73.375 70.198,73.375 100n.1 69.673,74.1 70.198,74.625 70.298,74.625 71.131,75.457 73.2,75.457 73.512,75.769 73.988,75.769 74.026,75.806 74.328,75.806 R5.1 ; DA1.1 78.418,66.582 78.225,66.775 78.225,68.194 78.513,68.482 DA1.3 80.365,68.482 U1.25
  Layer 2 w0.15: U3.2 71.084,71.391 71.084,71.834 71.5,72.25 80.5,72.25 80.688,72.438 80.812,72.438 82.027,71.223 82.027,70.64 U1.25
VDDA: R2.1 R7.2 U2.13 | length 48.6
  Layer 2 w0.15: v1(68.675,48.25) 69.539,49.114 69.539,55.014 69.529,55.024 69.529,56.312 73.457,60.24 73.457,61.521 72.103,62.875 70.153,62.875 68.875,64.153 68.875,66.292 69.237,66.655 v1(69.237,66.743)
  Bottom Layer w0.15: v1(68.675,48.25) 68.782,48.25 69.28,47.752 69.28,46.928 R2.1 ; U2.13 69.93,62.25 70.275,62.595 70.275,63.905 70.055,64.125 69.776,64.125 68.875,65.026 68.875,66.292 69.237,66.655 v1(69.237,66.743) 68.653,66.743 68.31,67.085 68.31,68.239 68,68.55 68,69.554 68.375,69.929 68.375,70.945 68.184,71.135 68.184,72.203 68.709,72.727 70.118,72.727 70.878,73.486 70.878,74.208 71.644,74.975 72.675,74.975 73.456,75.755 73.456,77.036 R7.2
VIN: R9.2 R10.1 U2.20 | length 19.8
  Layer 1 w0.15: v1(68.75,75.25) 68.75,70.434 69.75,69.434 69.75,67.855 70.448,67.156 71.067,67.156 72.074,66.149 v1(73.675,67.75)
  Bottom Layer w0.15: v1(68.75,75.25) 69.193,75.693 69.368,75.693 R9.2 R10.1 ; U2.20 72.475,65.575 72.475,66.55 v1(73.675,67.75)
pads on no net: D4.2 D4.3 D4.4 D4.10 D4.13 D4.15 D4.16 D4.17 D4.18 D4.19 D4.20 D4.27 D4.28 D4.30 D4.31 D4.32 D4.33 D4.38 DA1.4 U1.1 U1.2 U1.3 U1.4 U2.2 U2.3 U2.8 U2.9 U2.10 U2.11 U2.24 U2.25 U2.29 U2.30 U2.33 U2.34 U2.35 U2.36 U2.37 U2.38 U2.39 U2.40 U2.41 U2.44 U2.45 U2.50 U2.51 U2.52 U2.53 U2.54 U3.1

## Polygon pours and split planes (outlines as drawn)
GND on Top Layer "Bottom Layer-No Net" (solid, remove dead copper, pour order 9): 62.979,82.25 84.25,82.25 86,82.25 86,40.75 62.979,40.75 62.979,43.102
GND on Top Layer "Plano masa TOP" (solid, remove dead copper, pour order 2): 68.076,78.75 81.224,78.75 81.25,78.725 81.25,44.15 68.05,44.175
GND on Bottom Layer "Bottom Layer-No Net" (solid, remove dead copper, pour order 4): 63,82 86,82 86,43.5 86,41.25 83.25,41.25 63,41.25
GND on Bottom Layer "Plano masa TOP" (solid, remove dead copper, pour order 3): 68.066,78.75 81.214,78.75 81.24,78.725 81.24,44.15 68.04,44.175
GND on Layer 1 "Bottom Layer-No Net" (solid, remove dead copper, pour order 5): 63,82 84,82 84.5,82 86,82 86,40.75 65.5,40.75 63,40.75
GND on Layer 2 "Bottom Layer-No Net" (solid, remove dead copper, pour order 7): 63.096,82.25 86,82.25 86,80.5 86,40.75 65.5,40.75 63.096,40.75

## Keep-outs
Keep-Out Layer:
  the board outline again, w0.254

## Silkscreen, mask and mechanical layers (free items; w line width, h text height)
Top Overlay:
  text "Swinkels / tolaemon / Sgw32" at 85.5,66.743 h0.7
  text "-UltiSID  / v1-" at 66.783,66.449 h0.7
  text "www.phol-labs.ru" at 67.224,42.927 h0.5
Mechanical 4 (Mech4):
  the board outline again, w0.254